# Altium PCB AVR910_BLUETOOTH.PCBDOC
Units mm, origin at the board's own origin, x right, y up, seen from the top; angles counter-clockwise.
Board outline 152.4 x 101.6 mm, 2 copper layers (Top Layer, Bottom Layer); 28 components, 33 nets, 122 pads, 21 vias.
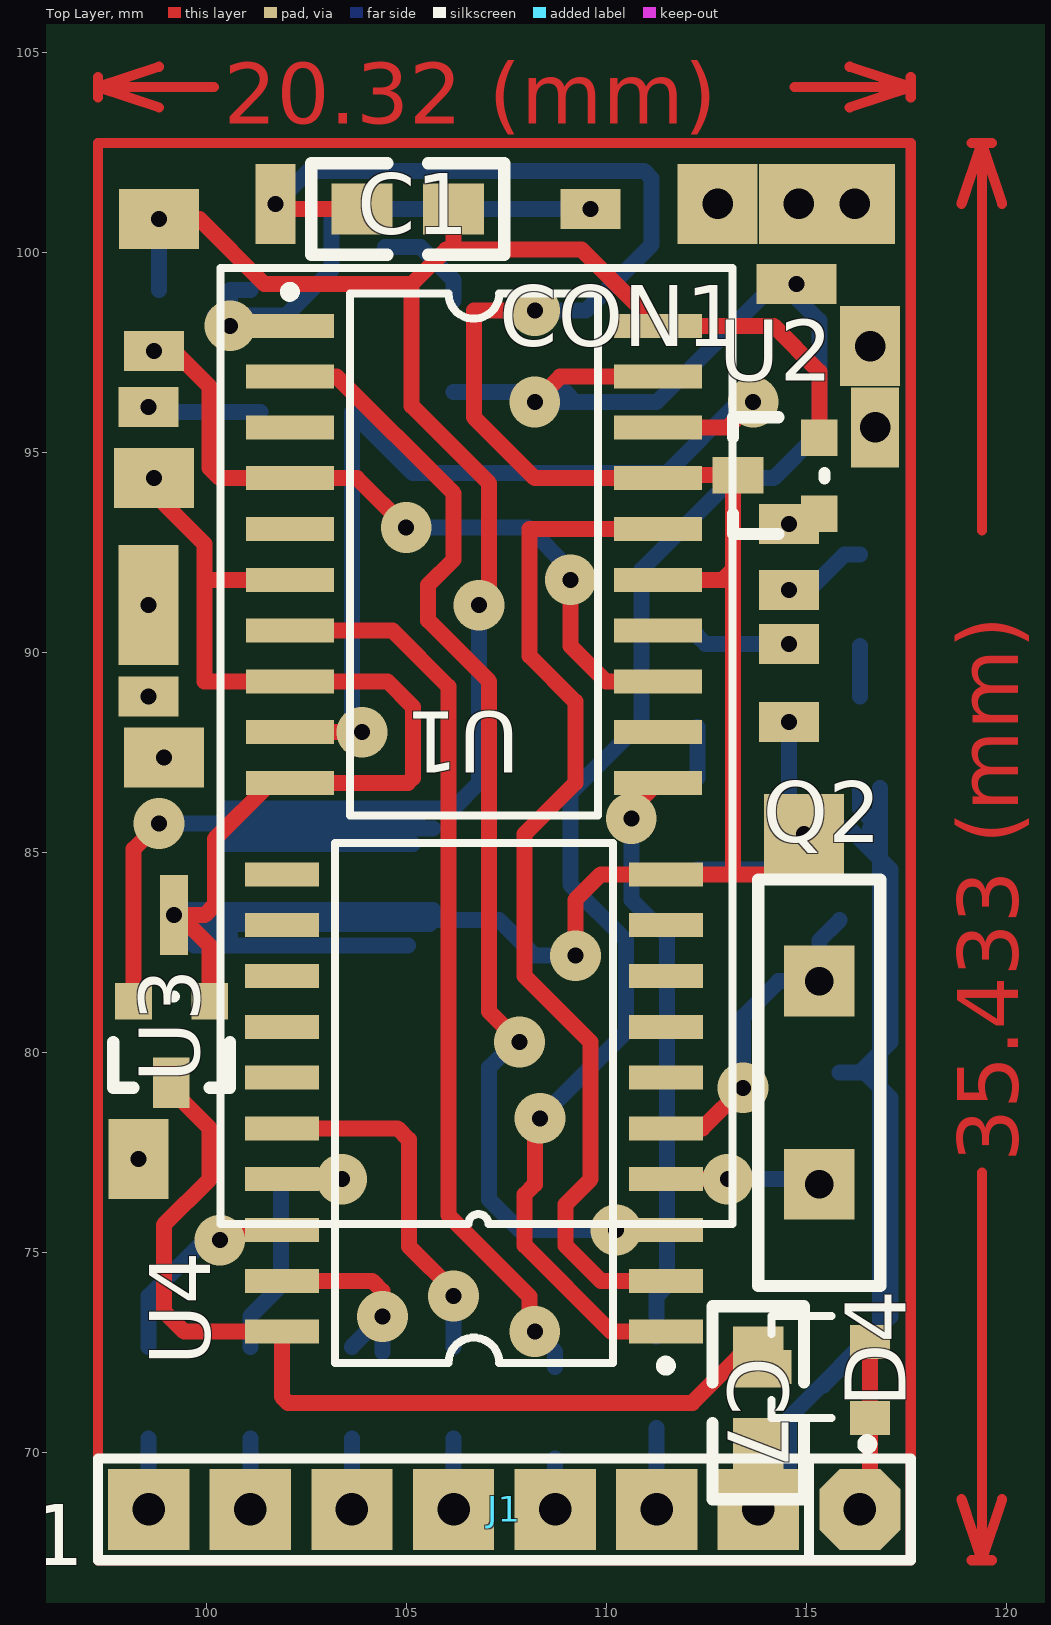
[diagram p0: Top Layer view]
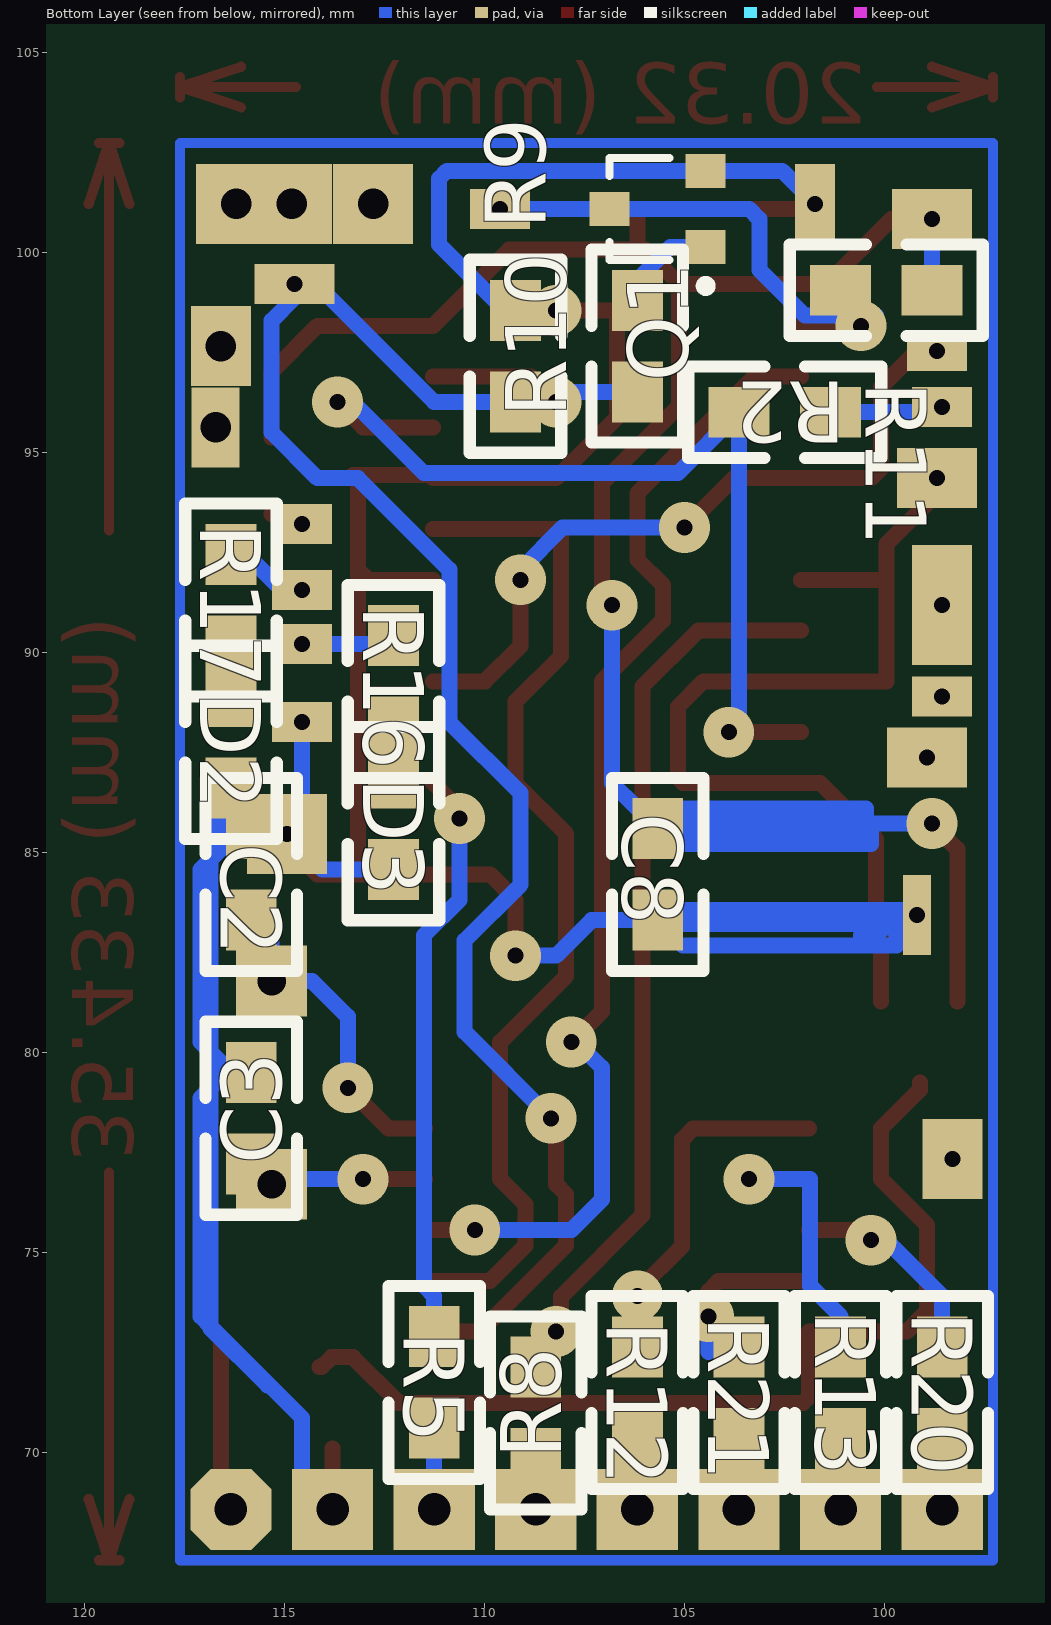
[diagram p1: Bottom Layer view, seen from below]

## Layer stack, top to bottom
Top Layer: signal copper 0.0356
Dielectric: dielectric 0.32, FR-4, Dk 4.8
Bottom Layer: signal copper 0.0356

## Board outline
25.4,25.4 177.8,25.4 177.8,127 25.4,127

## Design rules (kind name [scope] priority, off if disabled: settings)
Clearance [All] p1: gap=0.1
ComponentClearance [All] p1 off: gap=0.254 collisioncheckmode=0
PolygonConnect [All] p1: connectstyle=Relief reliefconductorwidth=0.254 reliefentries=4 polygonreliefangle="90 Angle"
RoutingLayers [All] p1: top layer=Horizontal bottom layer=Vertical
RoutingVias [All] p1: holewidth=0.711 width=1.27 viastyle="Through Hole" minholewidth=0.711 minwidth=1.27 maxholewidth=0.711 maxwidth=1.27
SolderMaskExpansion [All] p1: expansion=0.102
TestPointUsage [All] p1: valid=0 allowmultiple=FALSE
Testpoint [All] p1: side=15 testpointundercomponent=TRUE minsize=1.016 maxsize=2.54 preferedsize=1.524 minholesize=0 maxholesize=1.016 preferedholesize=0.813 testpointgrid=0.025 style=1023 order=1234567890
Width [All] p1: maxlimit=1 minlimit=0.254 preferedwidth=0.4
16 further rules are at their usual default settings.

## Components (designator, comment, footprint, x,y, rotation, side; value= is the part's Value field where it differs from the comment)
C1 "Cap" 0805 106.172,101.092 r180 top
C2 "20p" 0805 115.824,83.312 r90 bottom
C3 "20p" 0805 115.824,77.216 r90 bottom
C7 "Cap" 0805 113.792,70.104 r90 top
C8 "Cap" 0805 105.664,83.312 r90 bottom
CON1 "F2M03AC2" F2M03AC2_conn 110.744,77.216 r180 top
D2 "TLED" 0805 116.332,88.9 r270 bottom
D3 "TLED" 0805 112.268,86.868 r270 bottom
D4 "BAT54C" SOT23#1 115.316,72.136 r90 top
J1 "TCON8" TSIP8 116.332,68.58 r180 top
Q1 "BSS123" SOT23#2 105.664,101.092 r90 bottom
Q2 "QUARTZ" XTAL1 115.316,76.708 r90 top
R2 "Res2" 0805 103.632,96.012 r180 bottom
R5 "Res2" 0805 111.252,70.612 r90 bottom
R8 "Res2" 0805 108.712,72.136 r270 bottom
R9 "Res2" 0805 109.22,98.552 r270 bottom
R10 "Res2" 0805 106.172,96.52 r90 bottom
R11 "Res2" 0805 101.092,99.06 r180 bottom
R12 "Res2" 0805 106.172,72.644 r270 bottom
R13 "Res2" 0805 101.092,72.644 r270 bottom
R16 "Res2" 0805 112.268,90.424 r270 bottom
R17 "Res2" 0805 116.332,92.456 r270 bottom
R20 "Res2" 0805 98.552,72.644 r270 bottom
R21 "Res2" 0805 103.632,72.644 r270 bottom
U1 "74ACT244M" SO20 106.68,92.456 r270 top
U2 "DS1818-10" SOT-23 115.316,93.472 r90 top
U3 "XC6206" sot-23 100.076,81.28 r180 top
U4 "AT90S1200-4SC" 20S 106.68,78.74 r90 top

## Footprints (in the part's own frame and the unit in brackets; to place one, negate y for a bottom-side part, rotate by r counter-clockwise, add the part's x,y. Pads: shape width x height; smd on the part's side, far side on the other; paste and mask are expansions set on the pad)
20S [mm] "Small Outline; 20 Leads; Body Width 7.5 mm; Pitch 1.27 mm"
  rect 0.6x1.85 smd: 1(-5.715,-4.8) 2(-4.445,-4.8) 3(-3.175,-4.8) 4(-1.905,-4.8) 5(-0.635,-4.8) 6(0.635,-4.8) 7(1.905,-4.8) 8(3.175,-4.8) 9(4.445,-4.8) 10(5.715,-4.8) 11(5.715,4.8) 12(4.445,4.8) 13(3.175,4.8) 14(1.905,4.8) 15(0.635,4.8) 16(-0.635,4.8) 17(-1.905,4.8) 18(-3.175,4.8) 19(-4.445,4.8) 20(-5.715,4.8)
  silkscreen extent -6.69,-4.92 6.5,3.48
0805 [mil]
  rect 60x50 smd: 1(0,0) 2(90,0)
  silkscreen extent -50,-45 140,45
F2M03AC2_conn [mm]
  rect 1.5x1 hole 0.4: 1(12.192,-11.684) 9(12.192,-18.923) 10(12.065,-20.32) 21(1.143,-23.876) 28(-3.81,-16.002) 30(-3.81,-14.351) 31(-3.81,-13) 33(-3.81,-11.049)
  rect 2x1.5 hole 0.4: 7(12.065,-17.145) 12(11.938,-23.622)
  rect 1x2 hole 0.4: 13(9.017,-24.003)
  rect 2x1 hole 0.4: 22(-4,-22)
  rect 2x2 hole 0.4: 34(-4.191,-8.255)
  rect 0.7x2 hole 0.4: 35(11.557,-6.223)
  rect 1.5x2 hole 0.4: 38(12.446,-0.127)
  silkscreen extent -2.4,-22.4 10.4,1.5
SO20 [mm] "Small Outline, Plastic; 20 Leads; Body Width 7.5 mm; Pitch 1.27 mm"
  rect 0.6x2.2 smd: 1(-5.715,-4.6) 2(-4.445,-4.6) 3(-3.175,-4.6) 4(-1.905,-4.6) 5(-0.635,-4.6) 6(0.635,-4.6) 7(1.905,-4.6) 8(3.175,-4.6) 9(4.445,-4.6) 10(5.715,-4.6) 11(5.715,4.6) 12(4.445,4.6) 13(3.175,4.6) 14(1.905,4.6) 15(0.635,4.6) 16(-0.635,4.6) 17(-1.905,4.6) 18(-3.175,4.6) 19(-4.445,4.6) 20(-5.715,4.6)
  silkscreen extent -6.69,-4.72 6.53,3.1
SOT23#1 [mm] "SOT-23; 3 Leads; Body 3.0 x 2.5 mm, inc. leads (LxW max)"
  rect 0.85x1 smd: 1(-1.27,-1.27) 2(0.635,-1.27) 3(0,1.2)
  silkscreen extent -2.05,-1.32 1.28,1.2
SOT23#2 [mm] "SOT-23; 3 Leads; Body 3.0 x 2.5 mm, inc. leads (LxW max)"
  rect 0.85x1 smd: 1(-0.95,-1.2) 2(0.95,-1.2) 3(0,1.2)
  silkscreen extent -2.05,-1.32 1.27,1.2
SOT-23 [mil]
  rect 36x36 smd: 1(0,0) 2(75,0)
  rect 36x50 smd: 3(38,80)
  silkscreen extent -20,-5 95,85
sot-23 [mil]
  rect 36x36 smd: 1(0,0) 2(75,0)
  rect 36x50 smd: 3(38,80)
  silkscreen extent -20,-5 95,85
TSIP8 [mil]
  oct 80x80 hole 32: 1(0,0)
  rect 80x80 hole 32: 2(100,0) 3(200,0) 4(300,0) 5(400,0) 6(500,0) 7(600,0) 8(700,0)
  silkscreen extent -50,-50 750,50
XTAL1 [mm]
  rect 1.77x1.77 hole 0.711: 1(0,0) 2(5.08,0)
  silkscreen extent -2.54,-1.52 7.62,1.52

## Part data
C1 C7 C8: "Capacitor"
C2 C3: library part CONDO
D4: "Schottky Barrier Double Diode"
Q1: "N-channel Enhancement Mode Vertical D-MOSFET"
R2 R5 R8 R9 R10 R11 R12 R13 R16 R17 R20 R21: "Resistor"
U1: "Octal Bus Buffer with 3 State Outputs (Non Inverted)"
U2: "3.3V EconoReset with Pushbutton"
U3: library part LM317
U4: "8-Bit AVR Microcontroller with 1K Byte of In-System Programmable Flash Memory"

## Free pads (board coordinates)
  rect 1.5x3 hole 0.4: 0(98.552,91.186)
  rect 2x1.5 hole 0.4: 0(98.933,87.376)
  rect 2x2 hole 0.762: 0(112.776,101.219) 0(114.808,101.219) 0(116.205,101.219)
  rect 1.5x2 hole 0.762: 0(116.586,97.663)
  rect 1.2x2 hole 0.762: 0(116.713,95.631)

## Via types
v1: diameter 1.27, hole 0.4, Top Layer to Bottom Layer, 21 vias

## Nets (pads, with @x,y where several pads share a name; then routed paths per layer and width w, separated by ;. In a path a pad name is that pad's centre, name@x,y a point inside that pad or via, vN(x,y) a via of type N, cw(c..) or ccw(c..) an arc to the next point about the centre after c; other vN are vias at no path point)
3V3: C1.1 C8.2 CON1.12 R11.2 U1.20 U2.2 U3.2 | length 114.4
  Top Layer w0.4: 98.171,85.09 v1(98.806,85.725) 98.171,85.09 ; 98.171,85.09 U3.2 98.171,85.09 ; 99.822,100.838 CON1.12 99.822,100.838 ; 99.822,100.838 101.444,99.216 105.127,99.216 ; 105.127,99.216 105.987,100.076 ; 105.127,99.216 105.127,96.168 107.061,94.234 v1@107.061,91.44 ; 105.987,100.076 109.375,100.076 ; 105.987,100.076 106.172,100.076 ; 105.987,100.076 106.172,100.076 ; 106.172,100.076 C1.1 106.172,100.076 ; 106.172,100.076 109.375,100.076 ; v1@107.061,91.44 v1(106.807,91.186) v1@107.061,91.44 ; 109.375,100.076 U1.20 ; 109.375,100.076 U1.20 ; U1.20 114.173,98.171 ; U1.20 114.173,98.171 ; 114.173,98.171 115.316,97.028 ; 115.316,97.028 U2.2 115.316,97.028
  Bottom Layer w0.4: C8.2@105.156,85.217 100.33,85.217 ; v1(98.806,85.725) 105.283,85.725 100.33,85.725 ; v1(98.806,85.725) 100.33,85.725 ; v1(98.806,85.725) 100.33,85.725 ; 100.33,85.217 100.33,85.725 ; 100.33,85.217 100.33,85.725 ; 100.33,85.217 100.711,85.598 ; 100.33,85.725 100.457,85.852 ; 100.33,85.725 100.457,85.852 ; 100.457,85.852 100.457,86.106 ; 100.457,86.106 C8.2@106.172,86.106 ; 100.457,86.106 C8.2@105.664,86.106 ; 100.457,86.106 C8.2@105.664,86.106 ; 100.711,85.598 C8.2 100.711,85.598 ; C8.2@105.664,86.106 C8.2@106.172,86.106 ; C8.2@106.172,86.106 106.807,86.741 ; 106.807,86.741 v1(106.807,91.186) 106.807,86.741 ; R11.2 CON1.12 R11.2
5V: C7.2 D4.3 U3.3 U4.20 | length 29.6
  Top Layer w0.4: U3.3@99.111,79.07 U3.3 U3.3@99.111,79.07 ; U3.3@99.111,79.07 100.076,78.105 100.076,76.835 98.933,75.692 98.933,73.533 99.441,73.025 ; 99.441,73.025 U4.20 ; 99.441,73.025 U4.20 ; 101.88,71.4 U4.20 ; 101.88,71.4 U4.20 ; 101.88,71.4 102.033,71.247 112.141,71.247 C7.2@113.284,72.39 ; C7.2@113.284,72.39 D4.3@113.817,72.39 ; C7.2@113.284,72.39 C7.2 ; C7.2@113.284,72.39 C7.2 ; C7.2 D4.3@113.817,72.39 ; D4.3@113.817,72.39 D4.3@114.071,72.136 ; D4.3@114.071,72.136 D4.3 D4.3@114.071,72.136
/RST: J1.5 R12.2 | length 3.6
  Bottom Layer w0.4: J1.5 R12.2 J1.5
/RSTPROG: CON1.21 Q1.3 R11.1 U1.1 | length 14.5
  Top Layer w0.4: v1(100.584,98.171) U1.1
  Bottom Layer w0.4: v1@100.203,98.425 101.981,98.425 103.124,99.568 103.124,100.838 103.378,101.092 CON1.21 ; R11.1@100.33,98.425 R11.1@100.584,98.679 ; v1(100.584,98.171) 100.584,99.06 R11.1
CTS: 
DTR: CON1.22 R9.2 R10.1 U1.19 U4.1 | length 67.2
  Top Layer w0.4: v1@108.204,77.978 v1@108.585,78.359 ; v1@108.204,77.978 v1@108.458,78.232 ; v1@108.204,77.978 v1@108.458,78.232 ; v1@108.204,77.978 108.204,76.708 107.95,76.454 107.95,75.184 110.109,73.025 ; v1@108.458,78.232 v1@108.585,78.359 ; v1@108.585,78.359 v1(108.331,78.359) v1@108.585,78.359 ; 108.839,96.901 U1.19 108.839,96.901 ; 108.839,96.901 v1(108.204,96.266) 108.839,96.901 ; 110.109,73.025 U4.1 110.109,73.025
  Bottom Layer w0.4: R10.1 R9.2@108.966,96.52 ; R10.1 v1@108.204,96.52 ; R10.1 v1@108.204,96.52 ; v1(108.204,96.266) 111.252,96.266 ; v1(108.204,96.266) R9.2 ; v1(108.204,96.266) R9.2 ; v1@108.204,96.52 R9.2@108.966,96.52 ; R9.2@108.966,96.52 R9.2 ; R9.2@108.966,96.52 R9.2 ; R9.2 111.252,96.266 ; 110.49,80.518 v1(108.331,78.359) 110.49,80.518 ; 110.49,80.518 110.49,82.804 109.093,84.201 109.093,86.487 110.871,88.265 110.871,92.075 113.157,94.361 114.173,94.361 115.316,95.504 115.316,98.298 CON1.22@114.744,98.87 ; 111.252,96.266 CON1.22@114.202,99.216 ; CON1.22@114.202,99.216 CON1.22 ; CON1.22@114.202,99.216 CON1.22 ; CON1.22@114.744,98.87 CON1.22 ; CON1.22@114.744,98.87 CON1.22
GND: C1.2 C2.2 C3.2 C7.1 C8.1 CON1.7 CON1.13 CON1.33 CON1.34 CON1.35 D2.2 D3.2 J1.2 Q1.2 R9.1 U1.6 U1.8 U1.10 U1.15 U1.17 U2.3 U3.1 U4.10 | length 287
  Top Layer w0.4: CON1.13 101.854,101.092 C1.2 ; v1(108.204,98.552) 106.68,98.552 106.68,95.885 108.204,94.361 U1.17 111.356,94.437 U2.3 113.157,94.31 113.157,84.455 ; v1(109.22,82.423) 109.22,83.82 109.855,84.455 114.173,84.455 CON1.34@114.935,85.217 ; U1.15 112.903,91.821 113.157,92.075 ; J1.2@114.554,68.58 114.554,68.453 114.109,68.897 J1.2@113.792,69.215 ; CON1.7@98.679,93.98 CON1.7 CON1.7@98.679,93.98 ; CON1.7@98.679,93.98 99.949,92.71 ; CON1.35 99.949,83.439 ; CON1.35 CON1.35@99.314,83.439 ; CON1.35 CON1.35@99.314,83.439 ; CON1.35@99.314,83.439 100.076,82.677 ; CON1.35@99.314,83.439 99.949,83.439 ; CON1.35@99.314,83.439 100.076,82.677 ; 99.949,83.439 100.203,83.693 100.203,85.344 U1.10@101.6,86.741 ; 99.949,89.281 104.521,89.281 ; 99.949,89.281 U1.8 ; 99.949,89.281 99.949,92.71 ; 99.949,89.281 99.949,91.821 ; 99.949,89.281 U1.8 ; 99.949,89.281 99.949,91.821 ; 99.949,91.821 U1.6 99.949,91.821 ; 99.949,91.821 99.949,92.71 ; 100.076,82.677 U3.1 100.076,82.677 ; U1.10@101.6,86.741 105.029,86.741 ; U1.10@101.6,86.741 U1.10 ; U1.10@101.6,86.741 U1.10 ; U1.10 105.029,86.741 ; U1.8 104.521,89.281 ; 104.521,89.281 105.156,88.646 105.156,86.868 105.029,86.741 ; J1.2@113.792,69.215 C7.1 J1.2 J1.2@113.792,69.215 ; CON1.34@114.935,85.217 114.935,85.852 CON1.34@114.935,85.217
  Bottom Layer w0.4: CON1.35 99.187,83.312 CON1.35@99.314,83.312 ; 99.568,83.216 CON1.35@99.314,83.312 ; 99.695,83.439 99.695,82.677 C8.1@105.029,82.677 ; 100.457,82.677 99.83,83.304 ; CON1.13 102.55,102.042 110.937,102.042 111.125,101.854 111.125,100.203 109.474,98.552 v1(108.204,98.552) ; C8.1@105.664,83.566 99.568,83.566 99.83,83.304 ; v1(109.22,82.423) 108.204,82.423 107.315,83.312 C8.1 C8.1@105.568,83.216 ; CON1.33 114.554,85.852 CON1.34 ; C2.2 C2.2@116.078,85.598 ; CON1.35@99.314,83.312 99.695,83.198 ; CON1.35@99.314,83.312 99.695,83.216 ; CON1.35@99.314,83.312 99.695,83.306 ; 99.695,83.198 100.04,83.094 ; 99.695,83.198 100.04,83.094 ; 99.695,83.216 100.023,83.111 ; 99.695,83.216 100.023,83.111 ; 99.695,83.216 C8.1@105.568,83.216 ; 99.695,83.306 99.83,83.304 ; 99.695,83.306 99.83,83.304 ; 99.83,83.304 C8.1@105.568,83.216 ; 99.83,83.304 C8.1@105.568,83.216 ; 100.023,83.111 100.584,82.931 ; 100.023,83.111 100.584,82.931 ; 100.04,83.094 100.584,82.931 ; 100.04,83.094 100.584,82.931 ; CON1.34@114.046,84.582 115.062,85.598 CON1.34@114.935,85.852 ; CON1.34@114.046,84.582 CON1.34@114.935,85.852 ; CON1.34@114.046,84.582 D3.2 CON1.34@114.046,84.582 ; CON1.34@114.046,84.582 CON1.34@114.935,85.852 ; 114.554,70.866 117.094,73.406 ; 114.554,70.866 116.84,73.152 ; 114.554,70.866 115.367,71.679 ; 114.554,70.866 114.554,68.58 114.554,70.866 ; 114.554,70.866 115.367,71.679 ; 115.367,71.679 115.418,71.679 ; 115.367,71.679 116.84,73.152 ; 115.367,71.679 115.418,71.679 ; 115.418,71.679 116.84,73.101 ; C3.2 116.459,79.502 ; C3.2 C3.2@116.332,79.502 ; C3.2 C3.2@116.332,79.502 ; C2.2@116.078,85.598 116.84,84.836 ; C2.2@116.078,85.598 117.094,84.582 ; C2.2@116.078,85.598 116.84,84.836 ; C3.2@116.332,79.502 117.094,80.264 ; C3.2@116.332,79.502 116.84,80.01 ; C3.2@116.332,79.502 116.84,80.01 ; C3.2@116.332,79.502 116.459,79.502 ; C2.2@116.332,86.106 D2.2 C2.2@116.332,86.106 ; C2.2@116.332,86.106 116.713,85.725 ; C2.2@116.332,86.106 116.84,85.598 ; C2.2@116.332,86.106 116.713,85.725 ; 116.459,79.502 117.094,78.867 ; 116.459,79.502 116.84,79.121 ; 116.586,85.598 D2.2@116.84,85.852 ; 116.586,85.598 116.713,85.725 ; 116.586,85.598 116.84,85.344 ; 116.586,85.598 116.713,85.725 ; 116.586,85.598 116.84,85.344 ; 116.713,85.725 D2.2@116.84,85.852 ; 116.713,85.725 116.84,85.598 ; 116.84,73.101 116.84,86.614 D2.2@116.84,85.852 ; 116.84,73.101 D2.2@116.84,85.852 ; 116.84,73.101 116.84,85.598 ; 116.84,73.101 116.84,85.344 ; 116.84,73.101 116.84,84.836 ; 116.84,73.101 116.84,80.01 ; 116.84,73.101 116.84,79.121 ; 116.84,73.101 116.84,73.152 ; 116.84,73.101 116.84,73.152 ; 116.84,73.152 116.84,79.121 ; 116.84,73.152 117.094,73.406 ; 116.84,79.121 117.094,78.867 ; 116.84,79.121 117.094,78.867 ; 116.84,79.121 116.84,80.01 ; 116.84,80.01 117.094,80.264 ; 116.84,80.01 116.84,84.836 ; 116.84,84.836 117.094,84.582 ; 116.84,84.836 116.84,85.344 ; 116.84,85.344 116.84,85.598 ; 116.84,85.598 D2.2@116.84,85.852 ; 117.094,73.406 117.094,78.867 ; 117.094,80.264 117.094,84.582
MISO: J1.7 R13.2 | length 3.6
  Bottom Layer w0.4: J1.7 R13.2 J1.7
MOSI: J1.8 R20.2 | length 3.6
  Bottom Layer w0.4: J1.8 R20.2 J1.8
NetC2_1: C2.1 Q2.2 U4.5 | length 15
  Top Layer w0.4: U4.5@112.395,78.105 v1(113.411,79.121) U4.5@112.395,78.105 ; U4.5@112.395,78.105 U4.5 U4.5@112.395,78.105
  Bottom Layer w0.4: 113.411,80.899 v1(113.411,79.121) 113.411,80.899 ; 113.411,80.899 114.3,81.788 ; 114.3,81.788 Q2.2 ; 114.3,81.788 Q2.2 ; Q2.2 C2.1@115.316,82.804 ; Q2.2 C2.1@115.316,82.804 ; C2.1@115.316,82.804 C2.1 C2.1@115.316,82.804
NetC3_1: C3.1 Q2.1 U4.4 | length 9.2
  Top Layer w0.4: U4.4 v1(113.03,76.835) U4.4
  Bottom Layer w0.4: C3.1@115.189,76.835 Q2.1 ; C3.1@115.189,76.835 v1(113.03,76.835) C3.1@115.189,76.835 ; C3.1@115.189,76.835 Q2.1 ; Q2.1 C3.1 Q2.1
NetCON1_28: CON1.28 U2.1 | length 2
  Top Layer w0.4: U2.1@115,93.218 U2.1@115,93.472 ; U2.1@115,93.218 CON1.28 U2.1@115,93.218 ; U2.1@115,93.218 U2.1@115,93.472 ; U2.1@115,93.472 U2.1 U2.1@115,93.472
NetCON1_30: CON1.30 R17.1 | length 3
  Bottom Layer w0.4: CON1.30@115.062,91.567 CON1.30 CON1.30@115.062,91.567 ; CON1.30@115.062,91.567 R17.1@115.951,92.456 ; R17.1@115.951,92.456 R17.1 R17.1@115.951,92.456
NetCON1_31: CON1.31 R16.1 | length 7.2
  Bottom Layer w0.4: R16.1@112.476,90.216 114.744,90.216 CON1.31 ; R16.1@112.476,90.216 CON1.31 ; R16.1@112.476,90.216 R16.1 R16.1@112.476,90.216 ; R16.1@112.476,90.216 CON1.31
NetD2_1: D2.1 R17.2 | length 2.5
  Bottom Layer w0.4: D2.1 R17.2 D2.1
NetD3_1: D3.1 R16.2 | length 2.5
  Bottom Layer w0.4: D3.1 R16.2 D3.1
NetQ1_1: Q1.1 R10.2 | length 3.9
  Bottom Layer w0.4: 105.344,100.142 Q1.1 105.344,100.142 ; 105.344,100.142 R10.2@106.172,99.314 ; R10.2@106.172,99.314 R10.2 R10.2@106.172,99.314
NetR2_1: R2.1 U1.9 U1.18 | length 39.4
  Top Layer w0.4: 113.03,95.631 v1(113.665,96.266) 113.03,95.631 ; 113.03,95.631 U1.18 113.03,95.631 ; U1.9 v1(103.886,88.011) U1.9
  Bottom Layer w0.4: v1@103.632,88.011 R2.1 ; v1@103.632,88.011 v1(103.886,88.011) v1@103.632,88.011 ; v1@103.632,88.011 R2.1 ; R2.1 105.156,94.488 ; R2.1 105.156,94.488 ; 105.156,94.488 111.506,94.488 v1@113.284,96.266 ; v1@113.284,96.266 v1(113.665,96.266) v1@113.284,96.266
NetR5_2: R5.2 U1.11 | length 18.8
  Top Layer w0.4: v1@110.617,86.078 U1.11 v1@110.617,86.078 ; v1@110.617,86.078 v1(110.617,85.852) v1@110.617,86.078
  Bottom Layer w0.4: 110.617,83.82 v1(110.617,85.852) 110.617,83.82 ; 110.617,83.82 111.506,82.931 111.506,74.168 111.252,73.914 ; 111.252,73.914 R5.2 111.252,73.914
NetR8_1: R8.1 U1.7 | length 28.1
  Top Layer w0.4: 104.648,90.551 U1.7 104.648,90.551 ; 104.648,90.551 106.045,89.154 106.045,75.935 108.077,73.903 v1@108.077,73.406 ; v1@108.077,73.406 v1@108.585,72.898 ; v1@108.077,73.406 v1@108.331,73.152 ; v1@108.331,73.152 v1@108.585,72.898 ; v1@108.331,73.152 v1(108.204,73.025) v1@108.331,73.152 ; v1@108.331,73.152 v1@108.585,72.898
  Bottom Layer w0.4: R8.1@108.712,72.517 v1(108.204,73.025) R8.1@108.712,72.517 ; R8.1@108.712,72.517 R8.1 R8.1@108.712,72.517
NetR12_1: R12.1 U4.16 | length 13.2
  Top Layer w0.4: 104.775,78.105 U4.16 104.775,78.105 ; 104.775,78.105 105.055,77.825 105.055,75.158 v1@106.172,74.041 ; v1@106.172,74.041 v1(106.172,73.914) v1@106.172,74.041
  Bottom Layer w0.4: R12.1 v1(106.172,73.914) R12.1
NetR13_1: R13.1 U4.17 | length 11.3
  Top Layer w0.4: U4.17 v1(103.378,76.835) U4.17
  Bottom Layer w0.4: 101.092,73.406 R13.1 101.092,73.406 ; 101.092,73.406 101.854,74.168 101.854,76.835 ; 101.854,76.835 v1(103.378,76.835) 101.854,76.835
NetR20_1: R20.1 U4.18 | length 13.8
  Top Layer w0.4: v1@100.33,75.565 U4.18 v1@100.584,75.565 ; v1@100.33,75.565 v1@100.584,75.565 ; v1@100.33,75.565 v1@100.584,75.565 ; v1@100.584,75.565 v1(100.33,75.311) v1@100.584,75.565
  Bottom Layer w0.4: 98.552,73.914 v1@100.203,75.565 ; 98.552,73.914 v1@100.139,75.501 ; 98.552,73.914 R20.1 98.552,73.914 ; 98.552,73.914 v1@100.139,75.501 ; v1@100.139,75.501 v1@100.203,75.565 ; v1@100.203,75.565 100.33,75.565 v1@100.203,75.565
NetR21_1: R21.1 U4.19 | length 10.2
  Top Layer w0.4: 104.14,74.295 U4.19 104.14,74.295 ; 104.14,74.295 104.394,74.041 ; 104.394,74.041 v1(104.394,73.406) 104.394,74.041
  Bottom Layer w0.4: 104.394,72.517 v1(104.394,73.406) ; 104.394,72.517 104.394,72.644 ; 104.394,72.517 104.394,72.644 ; 104.394,72.644 v1(104.394,73.406) ; v1(104.394,73.406) R21.1 v1(104.394,73.406)
RTS: 
RXBLUE: CON1.9 R2.2 | length 5.6
  Bottom Layer w0.4: CON1.9@98.948,96.012 R2.2 CON1.9@98.948,96.012 ; CON1.9@98.948,96.012 CON1.9 CON1.9@98.948,96.012
RXPROG: U1.16 U4.2 | length 30.8
  Top Layer w0.4: 108.077,93.091 U1.16 108.077,93.091 ; 108.077,93.091 108.077,89.916 109.22,88.773 109.22,86.741 107.95,85.471 107.95,81.915 109.601,80.264 109.601,76.835 108.966,76.2 108.966,75.184 109.855,74.295 ; 109.855,74.295 U4.2 109.855,74.295
RXUC: J1.4 R8.2 | length 2.5
  Bottom Layer w0.4: J1.4 R8.2 J1.4
SCK: J1.6 R21.2 | length 3.6
  Bottom Layer w0.4: J1.6 R21.2 J1.6
TXBLUE: CON1.10 U1.4 U1.13 | length 18.3
  Top Layer w0.4: CON1.10 99.187,97.536 100.076,96.647 100.076,94.615 100.33,94.361 103.759,94.361 v1(104.99,93.13) ; v1(109.093,91.821) 109.093,90.17 109.982,89.281 U1.13
  Bottom Layer w0.4: v1(104.99,93.13) 108.038,93.13 109.093,92.075 v1(109.093,91.821)
TXPROG: U1.2 U4.3 | length 35.3
  Top Layer w0.4: 103.251,96.901 U1.2 103.251,96.901 ; 103.251,96.901 106.172,93.98 106.172,92.329 105.537,91.694 105.537,90.805 107.061,89.281 107.061,81.026 ; 107.061,81.026 v1(107.823,80.264) 107.061,81.026 ; v1(110.236,75.565) U4.3 v1(110.236,75.565)
  Bottom Layer w0.4: v1@107.696,80.264 v1(107.823,80.264) v1@107.696,80.264 ; v1@107.696,80.264 107.061,79.629 107.061,76.327 107.823,75.565 ; 107.823,75.565 v1(110.236,75.565) 107.823,75.565
TXUC: J1.3 R5.1 | length 4.1
  Bottom Layer w0.4: J1.3 R5.1 J1.3
VCC: D4.1 D4.2 J1.1 | length 13.7
  Top Layer w0.4: J1.1@116.586,68.453 D4.2 D4.1 ; J1.1@116.586,68.453 D4.1 ; J1.1@116.586,68.453 J1.1@116.586,69.342 ; J1.1@116.586,68.453 J1.1@116.586,68.58 ; J1.1@116.586,68.453 J1.1@116.586,68.58 ; J1.1@116.586,68.58 J1.1@116.586,69.342 ; J1.1@116.586,69.342 J1.1 J1.1@116.586,69.342 ; J1.1@116.586,69.342 D4.1
pads on no net: CON1.1 CON1.38 U1.3 U1.5 U1.12 U1.14 U4.6 U4.7 U4.8 U4.9 U4.11 U4.12 U4.13 U4.14 U4.15
copper on no net: | length 40.1
  Top Layer w0.254: 97.282,103.886 97.282,104.394 ; 98.806,103.632 97.282,104.14 ; 98.806,104.648 97.282,104.14 ; 100.18,104.14 97.282,104.14 ; 114.704,104.14 117.602,104.14 ; 116.078,103.632 117.602,104.14 ; 116.078,104.648 117.602,104.14 ; 117.602,103.886 117.602,104.394 ; 118.872,68.834 119.38,67.31 ; 118.872,101.219 119.38,102.743 ; 119.126,67.31 119.634,67.31 ; 119.126,102.743 119.634,102.743 ; 119.38,77.003 119.38,67.31 ; 119.38,93.05 119.38,102.743 ; 119.888,68.834 119.38,67.31 ; 119.888,101.219 119.38,102.743

## Other copper
Top Layer:
  text "20.32 (mm)" at 100.434,103.226 h1.52
  text "35.433 (mm)" at 120.294,77.257 h1.52 r90
Multi-Layer:
  lines w0.254: 97.282,67.31 97.282,102.743 116.078,102.743 117.602,102.743 117.602,67.31 116.205,67.31 97.282,67.31